# Altium PCB LCDuino.PcbDoc
Units mm, origin at the board's own origin, x right, y up, seen from the top; angles counter-clockwise.
Board outline 68.58 x 26.67 mm, 2 copper layers (Top Layer, Bottom Layer); 18 components, 17 nets, 92 pads, 11 vias.
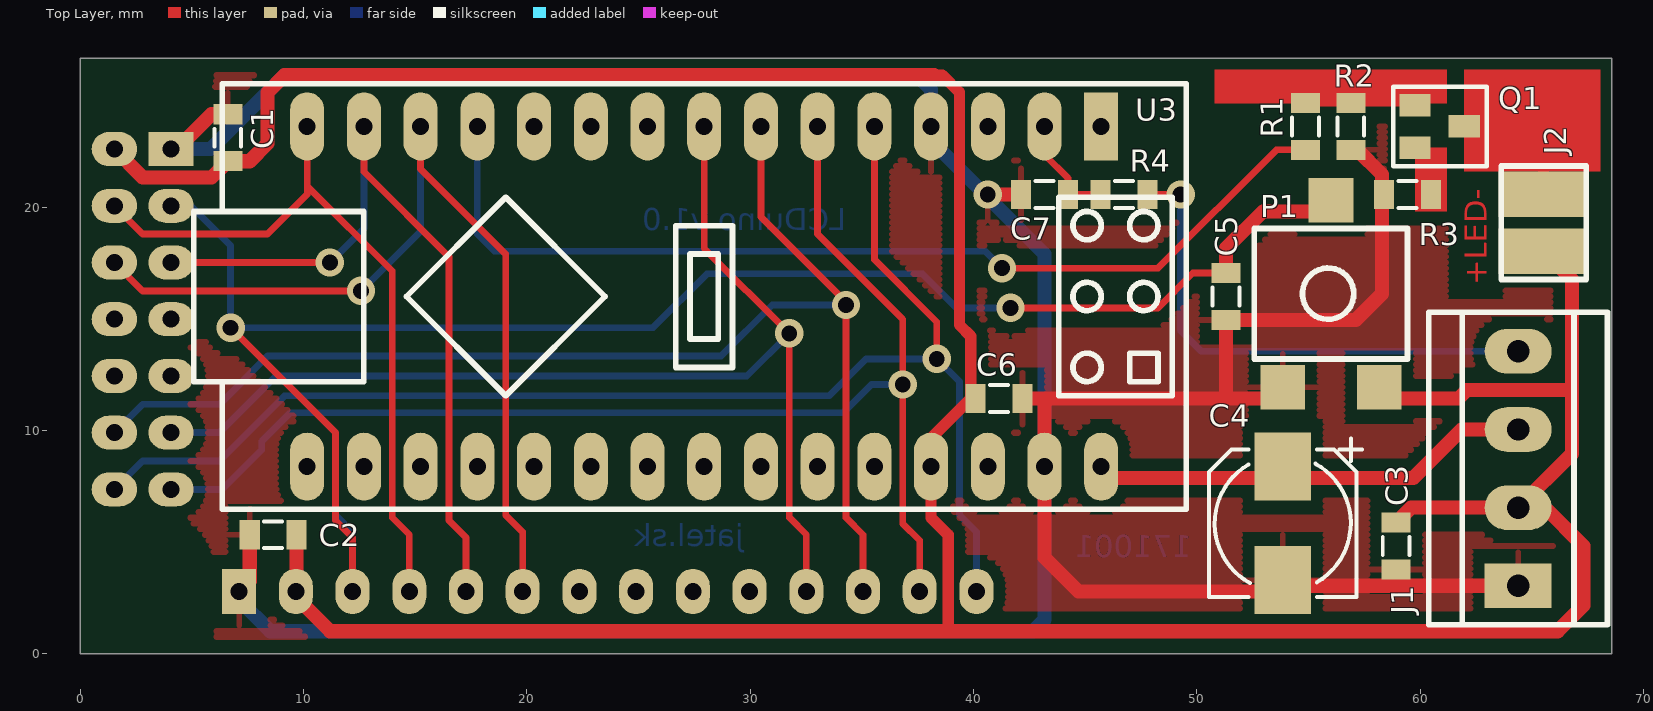
[diagram p0: Top Layer view]
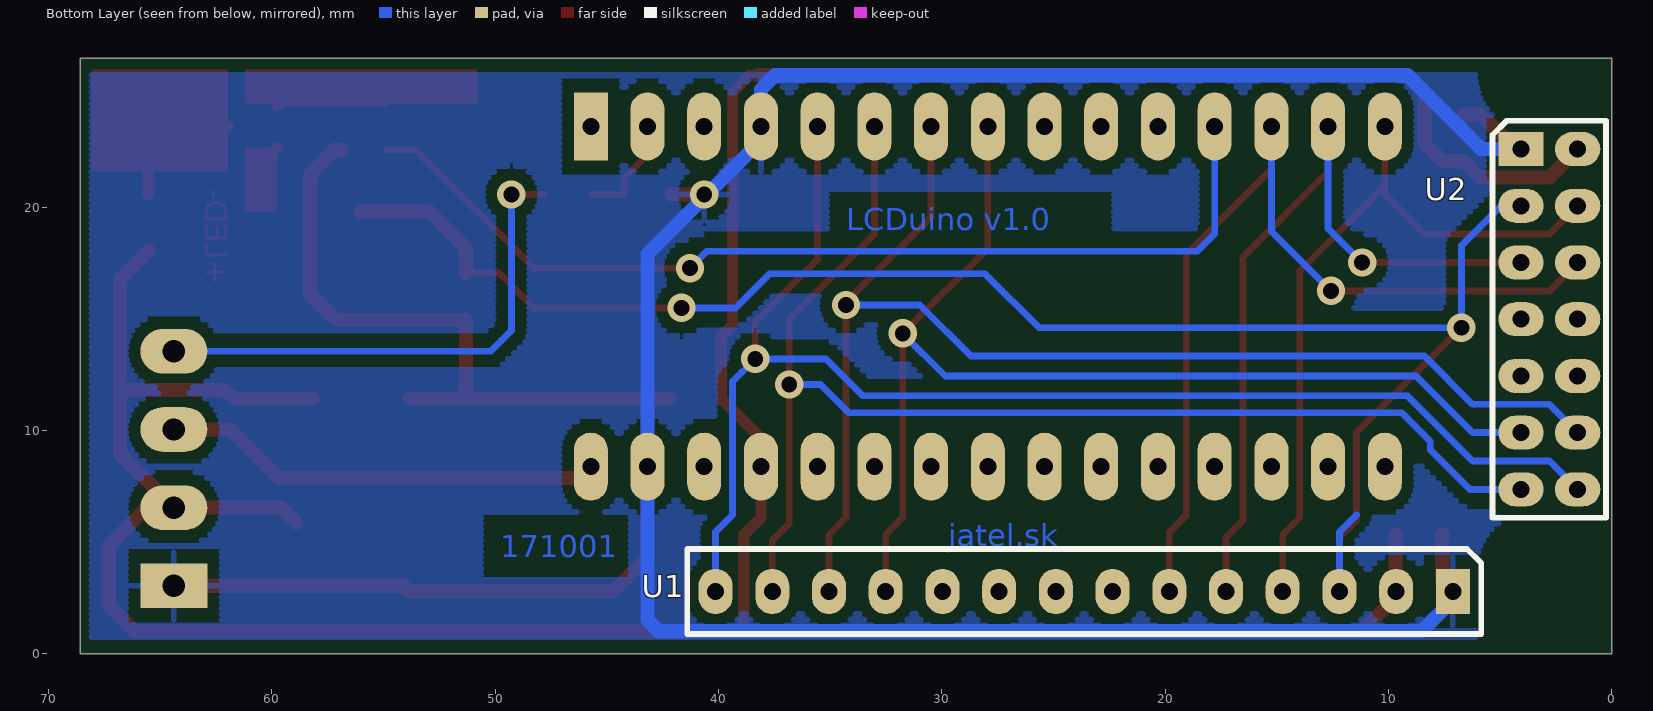
[diagram p1: Bottom Layer view, seen from below]

## Layer stack, top to bottom
Top Layer: signal copper 0.0356
Dielectric: dielectric 0.32, FR-4, Dk 4.8
Bottom Layer: signal copper 0.0356

## Board outline
0,0 68.58,0 68.58,26.67 5.541,26.67 0,26.67 0,0

## Design rules (kind name [scope] priority, off if disabled: settings)
Clearance [All] p1: gap=0.508
ComponentClearance [All] p1 off: gap=0.254 collisioncheckmode=3 verticalgap=0.254 showdistances=FALSE
PolygonConnect [All] p1: connectstyle=Relief reliefconductorwidth=0.254 reliefentries=4 polygonreliefangle="90 Angle"
RoutingVias [All] p1: holewidth=0.711 width=1.27 viastyle="Through Hole" minholewidth=0.711 minwidth=1.27 maxholewidth=0.711 maxwidth=1.27
SilkscreenOverComponentPads [All] p1: minsilkscreentomaskgap=0.254
SolderMaskExpansion [All] p1: expansion=0.102
Width [All] p1: maxlimit=2.54 minlimit=0.254 preferedwidth=0.635
26 further rules are at their usual default settings.

## Components (designator, comment, footprint, x,y, rotation, side; value= is the part's Value field where it differs from the comment)
C1 "100n" 0805 6.604,23.114 r90 top
C2 "100n" 0805 8.636,5.334 r180 top
C3 "100n" 0805 58.928,4.826 r270 top
C4 "100u/25" "SMD D" 53.848,5.842 r90 top
C5 "100n" 0805 51.308,16.002 r270 top
C6 "100n" 0805 41.148,11.43 r0 top
C7 "1n" 0805 43.18,20.574 r180 top
J1 "PWR" MTS04008 64.389,3.048 r90 top
J2 "LED" 2pin100 65.532,20.574 r270 top
P1 "10k" CA6VSMD 53.848,11.938 r0 top
Q1 "BCW66" SOT23 60.833,23.622 r270 top
R1 "2k2" 0805 54.864,23.622 r90 top
R2 "560R" 0805 56.896,23.622 r90 top
R3 "22R" 0805 59.436,20.574 r0 top
R4 "100R" 0805 46.736,20.574 r180 top
U1 "LCD Alphanumeric" LCDM14pin 7.112,2.794 r0 bottom
U2 "LCD Alphanumeric" LCDM_2x7pin 4.064,22.606 r0 bottom
U3 "ArduinoNano" ArduinoNano 45.72,23.622 r90 top

## Footprints (in the part's own frame and the unit in brackets; to place one, negate y for a bottom-side part, rotate by r counter-clockwise, add the part's x,y. Pads: shape width x height; smd on the part's side, far side on the other; paste and mask are expansions set on the pad)
2pin100 [mil] "2 pin 100mil"
  rect 80x160 smd: 1(0,0) 2(100,0)
  silkscreen extent -50,-75 150,75
0805 [mm]
  rect 0.9x1.3 smd: 1(-1.05,0) 2(1.05,0)
  silkscreen extent -0.4,-0.6 0.4,0.6
ArduinoNano [mil] "Arduino ATMEGA328"
  rect 120x60 hole 30: 1(0,0)
  oval 120x60 hole 30: 2(0,100) 3(0,200) 4(0,300) 5(0,400) 6(0,500) 7(0,600) 8(0,700) 9(0,800) 10(0,900) 11(0,1000) 12(0,1100) 13(0,1200) 14(0,1300) 15(0,1400) 16(-600,1400) 17(-600,1300) 18(-600,1200) 19(-600,1100) 20(-600,1000) 21(-600,900) 22(-600,800) 23(-600,700) 24(-600,600) 25(-600,500) 26(-600,400) 27(-600,300) 28(-600,200) 29(-600,100) 30(-600,0)
  silkscreen extent -675,-150 75,1600
CA6VSMD [mm] "Trimer SMD"
  rect 2x2 smd: 1(0,0) 2(2.159,8.382) 3(4.318,0)
  silkscreen extent -1.27,1.27 5.59,7.11
LCDM14pin [mil] "1x14pin"
  rect 60x80 hole 30: 1(0,0)
  oval 60x80 hole 30: 2(100,0) 3(200,0) 4(300,0) 5(400,0) 6(500,0) 7(600,0) 8(700,0) 9(800,0) 10(900,0) 11(1000,0) 12(1100,0) 13(1200,0) 14(1300,0)
  silkscreen extent -50,-75 1350,75
LCDM_2x7pin [mil] "LCD Modul 2x 7pin"
  rect 80x60 hole 30: 1(0,0)
  oval 80x60 hole 30: 2(-100,0) 3(0,100) 4(-100,100) 5(0,200) 6(-100,200) 7(0,300) 8(-100,300) 9(0,400) 10(-100,400) 11(0,500) 12(-100,500) 13(0,600) 14(-100,600)
  silkscreen extent -150,-50 50,650
MTS04008 [mm] "Skrutkovacia svorkovnica RM3.5mm 4P"
  rect 2x3 hole 1: 1(0,0)
  oval 2x3 hole 1: 2(3.5,0) 3(7,0) 4(10.5,0)
  silkscreen extent -1.75,-4 12.25,4
"SMD D" [mil]
  rect 120x100 smd: 1(100,0) 2(-100,0)
  silkscreen extent -130,-140 150,130, body extent -154,-130 154,130, height 217
SOT23 [mm]
  rect 1x1.4 smd: 1(-0.95,-1.057) 2(0.95,-1.057) 3(0,1.143)
  silkscreen extent -1.78,-2.03 1.78,2.16

## Part data
C1 C2 C3 C5 C6 C7: library part C, "kondenzator"
C4: library part C_EL, "Kondenzator elektroliticky"
J1: library part CON4, "Connector"
J2: library part CON2, "Connector"
P1: library part TRIMER
Q1: "NPN SMD"
R1 R2 R3 R4: library part R, "Rezistor"
U1 U2: library part LCD_Modul, "OLED"
U3: "Arduino Nano V3.0 ATmega328 16M 5V CH340G"

## Via types
v1: diameter 1.27, hole 0.711, Top Layer to Bottom Layer, 11 vias

## Nets (pads, with @x,y where several pads share a name; then routed paths per layer and width w, separated by ;. In a path a pad name is that pad's centre, name@x,y a point inside that pad or via, vN(x,y) a via of type N, cw(c..) or ccw(c..) an arc to the next point about the centre after c; other vN are vias at no path point)
5V: C1.1 C2.1 C3.1 C6.1 J1.2 J2.2 P1.3 U1.2 U2.2 U3.27 | length 163.5
  Top Layer w0.508: 38.227,25.908 38.608,25.908 39.37,25.146 39.37,14.732 39.878,14.224 39.878,11.43 38.1,9.652 U3.27 38.1,6.096 38.862,5.334 38.862,1.016
  Top Layer w0.635: U2.2 2.794,21.336 5.876,21.336 C1.1 7.586,22.064 8.382,22.86 8.382,25.146 9.144,25.908 38.227,25.908 ; C2.1 9.686,2.828 U1.2 9.652,2.54 11.176,1.016 38.862,1.016 66.167,1.016 67.31,2.159 67.31,4.826 65.588,6.548 J1.2 ; P1.3@58.166,11.43 61.722,11.43 62.103,11.811 66.802,11.811 ; C3.1 59.6,6.548 J1.2 ; J2.2 66.802,16.764 66.802,11.811 ; 66.802,11.049 66.802,11.811 ; J1.2 66.802,8.961 66.802,11.811
12V: C4.1 J1.3 U3.30 | length 19.8
  Top Layer w0.635: U3.30 46.228,7.874 53.848,7.874 59.69,7.874 61.864,10.048 J1.3
GND: C1.2 C2.2 C3.2 C4.2 C5.2 C6.2 C7.2 J1.1 P1.1 R2.1 R3.1 U1.1 U2.1 U3.4 U3.29 | length 166.3
  Top Layer w0.635: U2.1 4.318,22.606 5.876,24.164 C1.2 ; U1.1 7.586,3.268 C2.2 ; v1(40.64,20.574) C7.2 ; C6.2 43.18,11.43 ; 52.578,11.43 51.308,11.43 ; P1.1@53.848,11.43 51.308,11.43 ; R2.1 57.184,22.572 58.293,21.463 58.293,20.574 58.293,16.129 57.116,14.952 C5.2 51.308,11.43 ; J1.1 54.102,3.048 53.848,2.794 44.704,2.794 43.18,4.318 U3.29 43.18,11.43 ; 43.18,11.43 51.308,11.43
  Bottom Layer w0.635: U2.1 5.842,22.606 9.144,25.908 37.465,25.908 38.1,25.273 38.1,22.987 43.18,17.907 U3.29 43.18,1.524 42.672,1.016 8.509,1.016 7.112,2.413 U1.1
NetC7_1: C7.1 R4.2 U3.2 | length 4.9
  Top Layer w0.305: U3.2 43.18,22.352 44.23,21.302 C7.1 R4.2
NetJ2_1: J2.1 Q1.3 | length 5.8
  Top Layer w0.508: Q1.3 64.135,23.622 65.532,22.225 J2.1
NetQ1_1: Q1.1 R1.2 R2.2 | length 5
  Top Layer w0.305: R1.2 R2.2 59.676,24.672 Q1.1
  Top Layer w0.508: Q1.1@59.71,24.638 Q1.1
NetQ1_2: Q1.2 R3.2 | length 2.4
  Top Layer w0.508: Q1.2 60.486,21.962 R3.2
NetR1_1: R1.1 U3.12 | length 44.7
  Top Layer w0.305: v1(41.275,17.272) 48.26,17.272 53.56,22.572 R1.1
  Bottom Layer w0.305: U3.12 17.78,18.796 18.542,18.034 40.513,18.034 v1(41.275,17.272)
NetU1_4: U1.4 U2.4 U3.15 | length 33
  Top Layer w0.305: U2.4 2.794,18.796 8.382,18.796 10.16,20.574 10.16,20.955 ; U3.15 10.16,20.955 ; U1.4 14.732,5.334 13.97,6.096 13.97,17.145 10.16,20.955
NetU1_5: U1.5 U2.5 U3.14 | length 36.6
  Top Layer w0.305: U2.5 v1(11.176,17.526) ; U3.14 12.7,21.59 16.51,17.78 16.51,5.969 17.272,5.207 U1.5
  Bottom Layer w0.305: v1(11.176,17.526) 12.7,19.05 U3.14
NetU1_6: U1.6 U2.6 U3.13 | length 42.8
  Top Layer w0.305: U2.6 2.794,16.256 v1(12.573,16.256) ; U3.13 15.24,21.717 19.05,17.907 19.05,6.223 19.812,5.461 U1.6
  Bottom Layer w0.305: v1(12.573,16.256) 15.24,18.923 U3.13
NetU1_11: U1.11 U2.11 U3.8 | length 52.2
  Top Layer w0.305: U3.8 27.94,18.161 v1(31.75,14.351) 31.75,6.096 32.512,5.334 U1.11
  Bottom Layer w0.305: U2.11 6.223,9.906 6.731,10.414 8.763,12.446 29.845,12.446 v1(31.75,14.351)
NetU1_12: U1.12 U2.12 U3.7 | length 57.9
  Top Layer w0.305: U3.7 30.48,19.558 34.29,15.748 34.29,15.494 34.29,6.096 35.052,5.334 U1.12
  Bottom Layer w0.305: U2.12 2.794,11.176 6.223,11.176 8.382,13.335 28.702,13.335 30.988,15.621 v1(34.29,15.621)
NetU1_13: U1.13 U2.13 U3.6 | length 57.7
  Top Layer w0.305: U3.6 33.02,18.796 36.83,14.986 36.83,5.842 37.592,5.08 U1.13
  Bottom Layer w0.305: U2.13 6.35,7.366 8.128,9.144 8.128,9.525 9.398,10.795 34.163,10.795 35.433,12.065 v1(36.83,12.065)
NetU1_14: U1.14 U2.14 U3.5 | length 62
  Top Layer w0.305: U3.5 35.56,17.653 38.354,14.859 v1(38.354,13.208)
  Bottom Layer w0.305: U2.14 2.794,8.636 6.223,8.636 9.144,11.557 33.528,11.557 35.179,13.208 v1(38.354,13.208) 39.37,12.192 39.37,6.223 40.132,5.461 U1.14
RX: J1.4 R4.1 | length 23.1
  Top Layer w0.305: R4.1 v1(49.276,20.574)
  Bottom Layer w0.305: v1(49.276,20.574) 49.276,14.478 50.206,13.548 J1.4
V0: C5.1 P1.2 U1.3 U2.3 | length 78.2
  Top Layer w0.305: v1(6.731,14.605) 11.43,9.906 11.43,5.969 12.192,5.207 U1.3 ; v1(41.656,15.494) 48.26,15.494 49.818,17.052 C5.1
  Top Layer w0.635: C5.1 51.308,18.161 52.959,19.812 P1.2@56.007,19.812
  Bottom Layer w0.305: U2.3 4.953,20.066 6.731,18.288 v1(6.731,14.605) 25.654,14.605 28.067,17.018 37.719,17.018 39.243,15.494 v1(41.656,15.494) ; 11.43,6.223 12.192,5.461 U1.3
pads on no net: U1.7 U1.8 U1.9 U1.10 U2.7 U2.8 U2.9 U2.10 U3.1 U3.3 U3.9 U3.10 U3.11 U3.16 U3.17 U3.18 U3.19 U3.20 U3.21 U3.22 U3.23 U3.24 U3.25 U3.26 U3.28

## Polygon pours and split planes (outlines as drawn)
GND on Bottom Layer "GNDBOT" (hatched Horizontal grid 0.254 track 0.279, remove dead copper, pour order 1000): 6.096,0.508 6.096,3.81 ccw(c3.556,3.81) 3.556,6.35 3.302,6.35 0.508,6.35 0.508,23.368 3.556,23.368 ccw(c3.556,25.908) 6.096,25.908 6.096,26.162 7.366,26.162 68.072,26.162 68.072,0.508 6.096,0.508
GND on Top Layer "GNDTOP" (hatched Horizontal grid 0.254 track 0.279, remove dead copper, pour order 1001): 6.096,0.508 6.096,3.81 ccw(c3.556,3.81) 3.556,6.35 3.302,6.35 0.508,6.35 0.508,23.368 3.556,23.368 ccw(c3.556,25.908) 6.096,25.908 6.096,26.162 68.072,26.162 68.072,0.508 6.096,0.508

## Other copper
Top Layer:
  rectangle net NetJ2_1: 61.976,21.59 68.072,26.162
  rectangle net NetQ1_1: 50.8,24.638 61.214,26.162
  rectangle net NetQ1_2: 59.776,19.812 61.214,22.672
  text "+LED-" at 62.992,16.51 h1 r90
Bottom Layer:
  text "LCDuino v1.0" at 34.29,18.964 h1
  text "jatel.sk" at 29.718,4.826 h1
  text "171001" at 49.784,4.318 h1

## Silkscreen, mask and mechanical layers (free items; w line width, h text height)
Mechanical 1:
  lines w0.254: 0.032,23.923 0.032,5.874 3.016,5.874 cw(c3.016,3.302) 5.588,3.302 5.588,0 68.58,0 68.58,26.67 5.541,26.67 cw(c2.794,26.67) 2.794,23.923 0.078,23.923